# Altium PCB StationSolPortative.PcbDoc
Units mil, origin at the board's own origin, x right, y up, seen from the top; angles counter-clockwise.
Board outline 7255 x 4700 mil, 4 copper layers (Top Layer, Ground Plane, Power Plane, Botton Layer), stack 62.362 mil thick; 77 components, 74 nets, 388 pads, 55 vias.
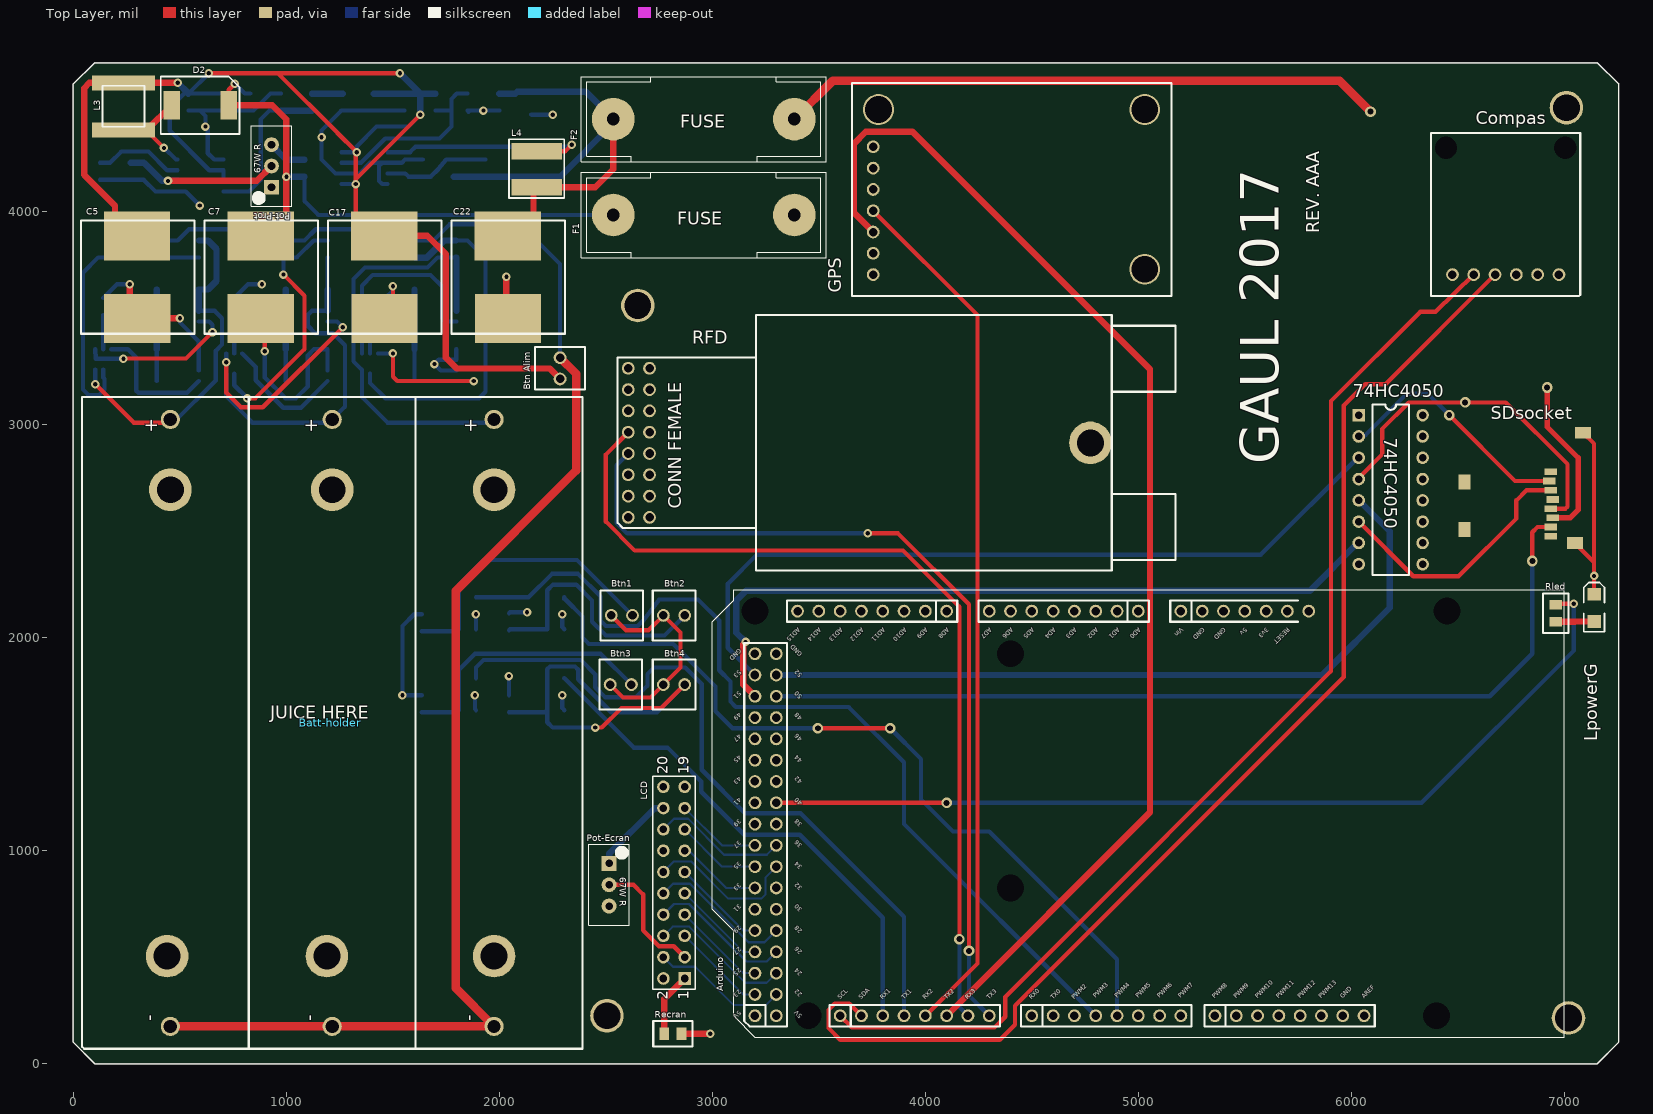
[diagram p0: Top Layer view]
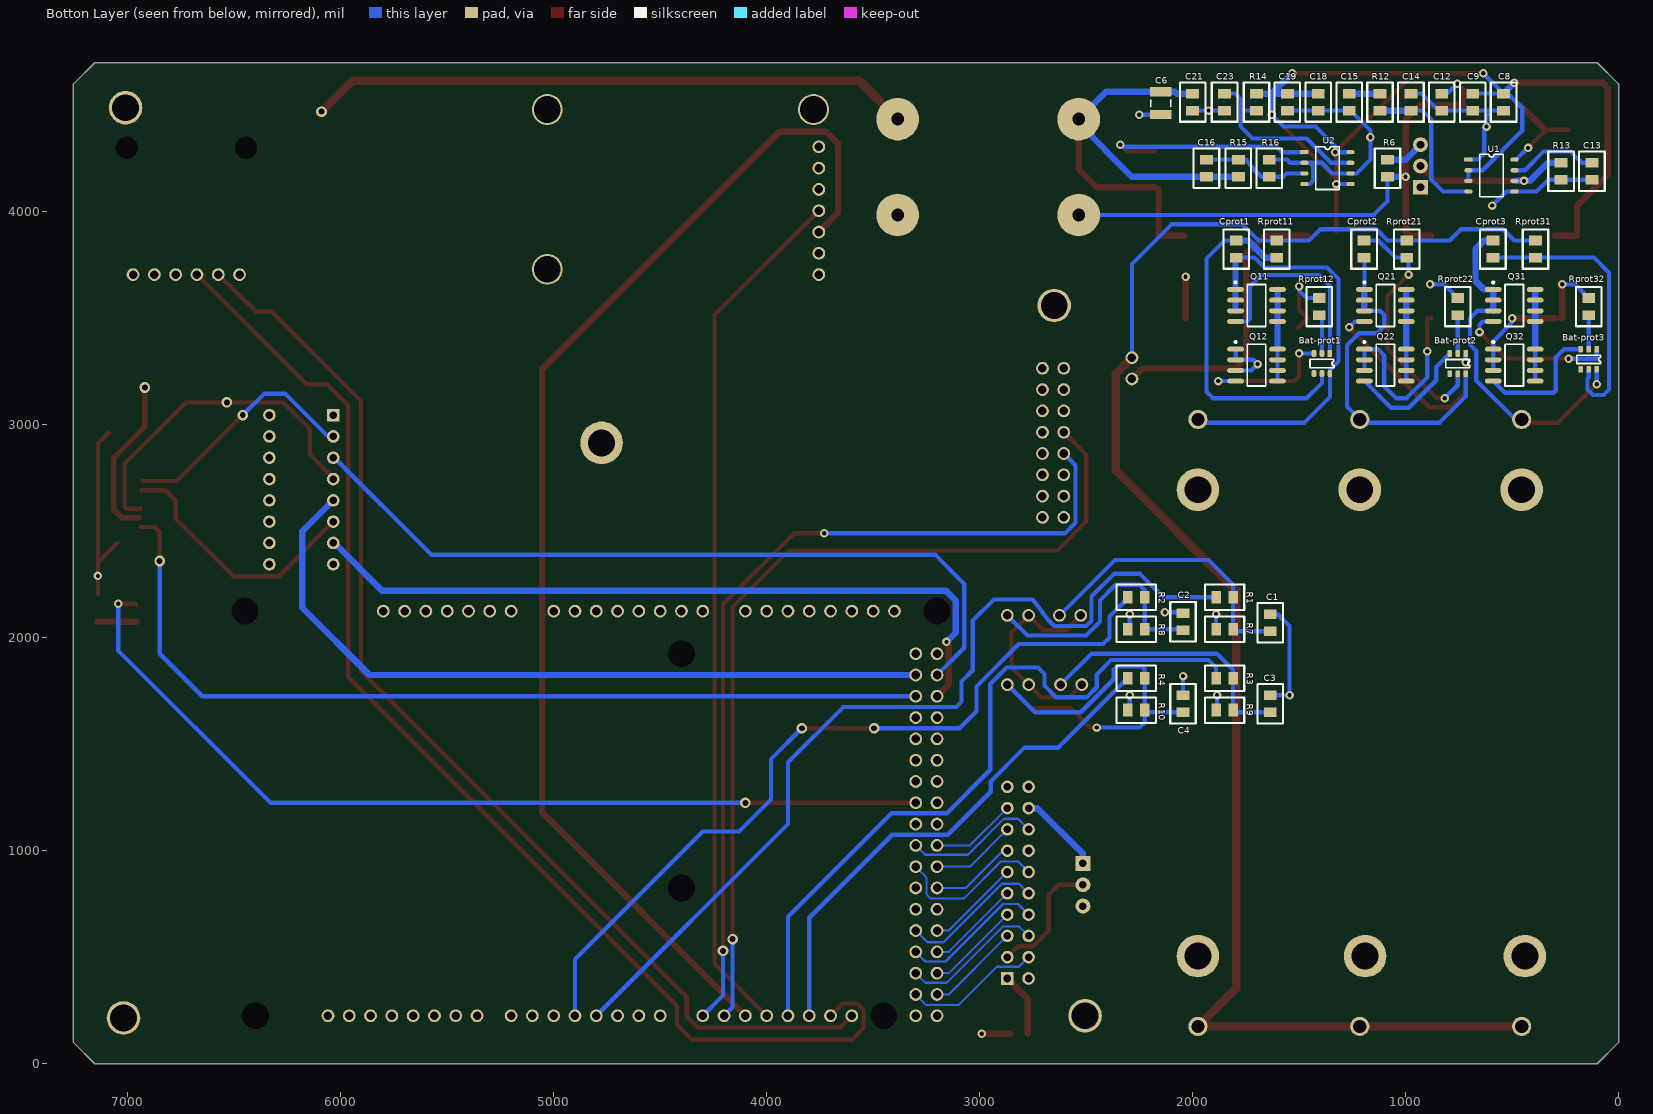
[diagram p1: Botton Layer view, seen from below]
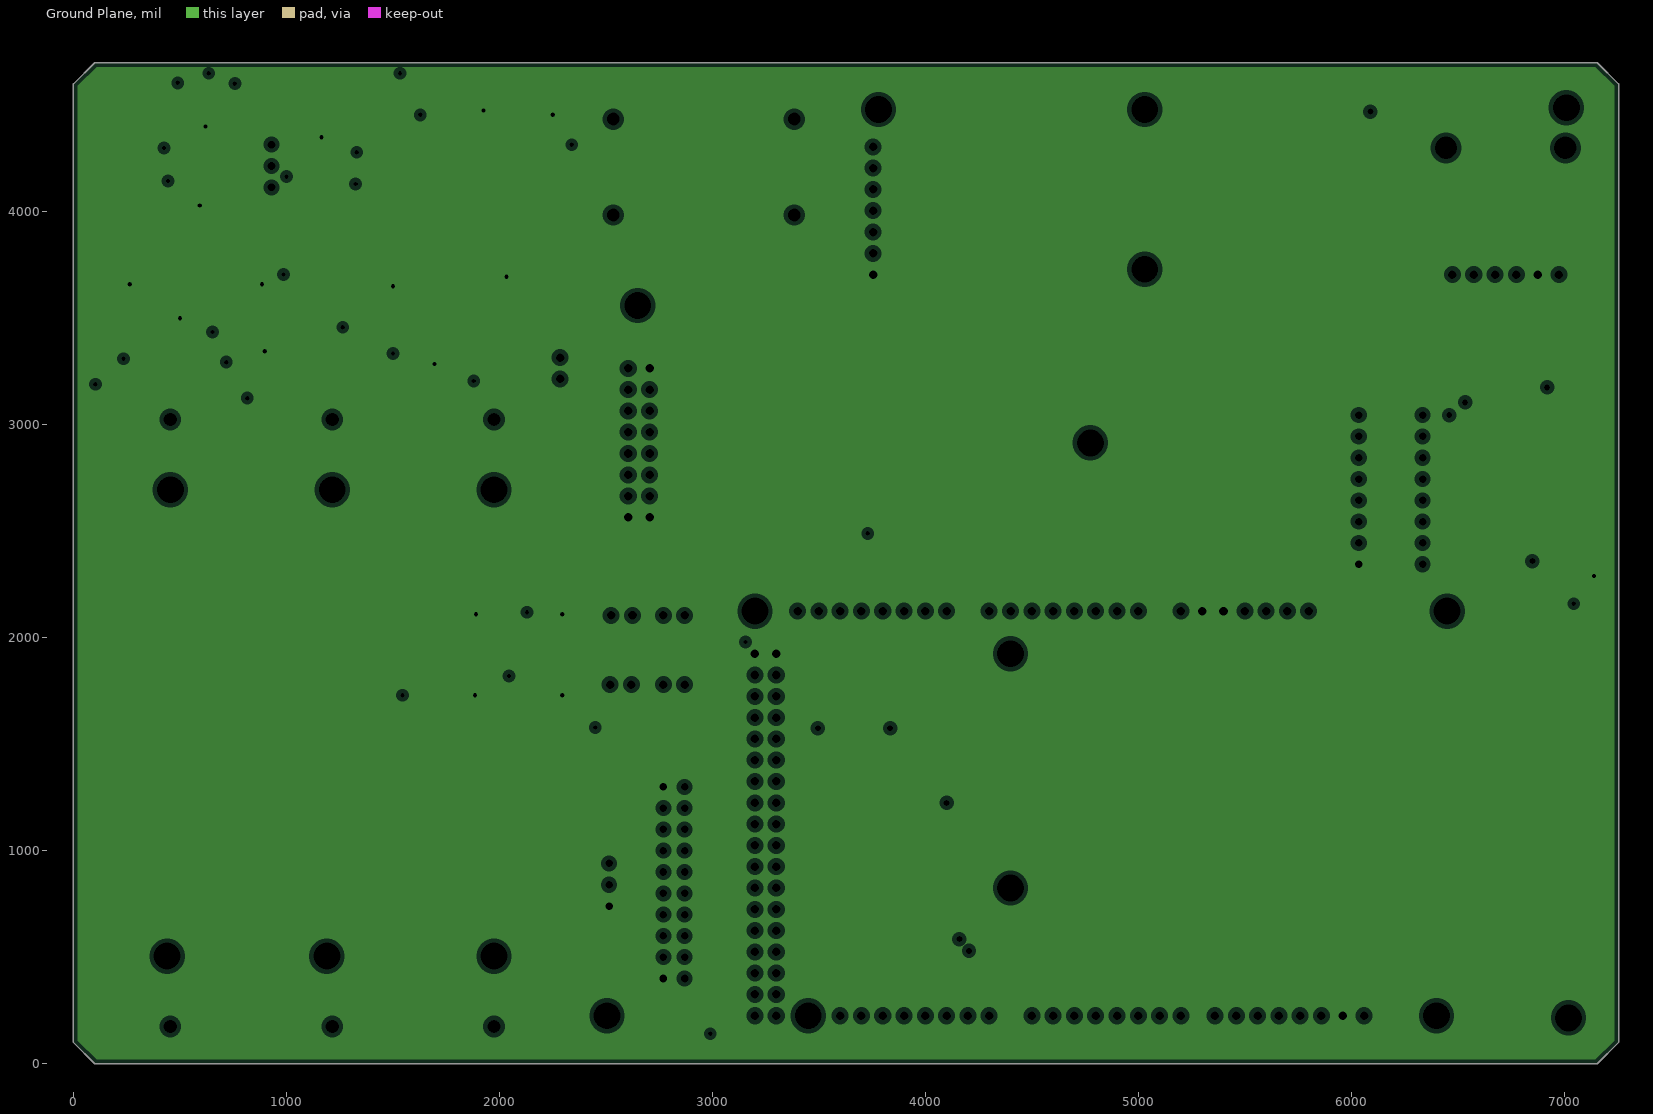
[diagram p2: Ground Plane, clearances drawn from the general rule]
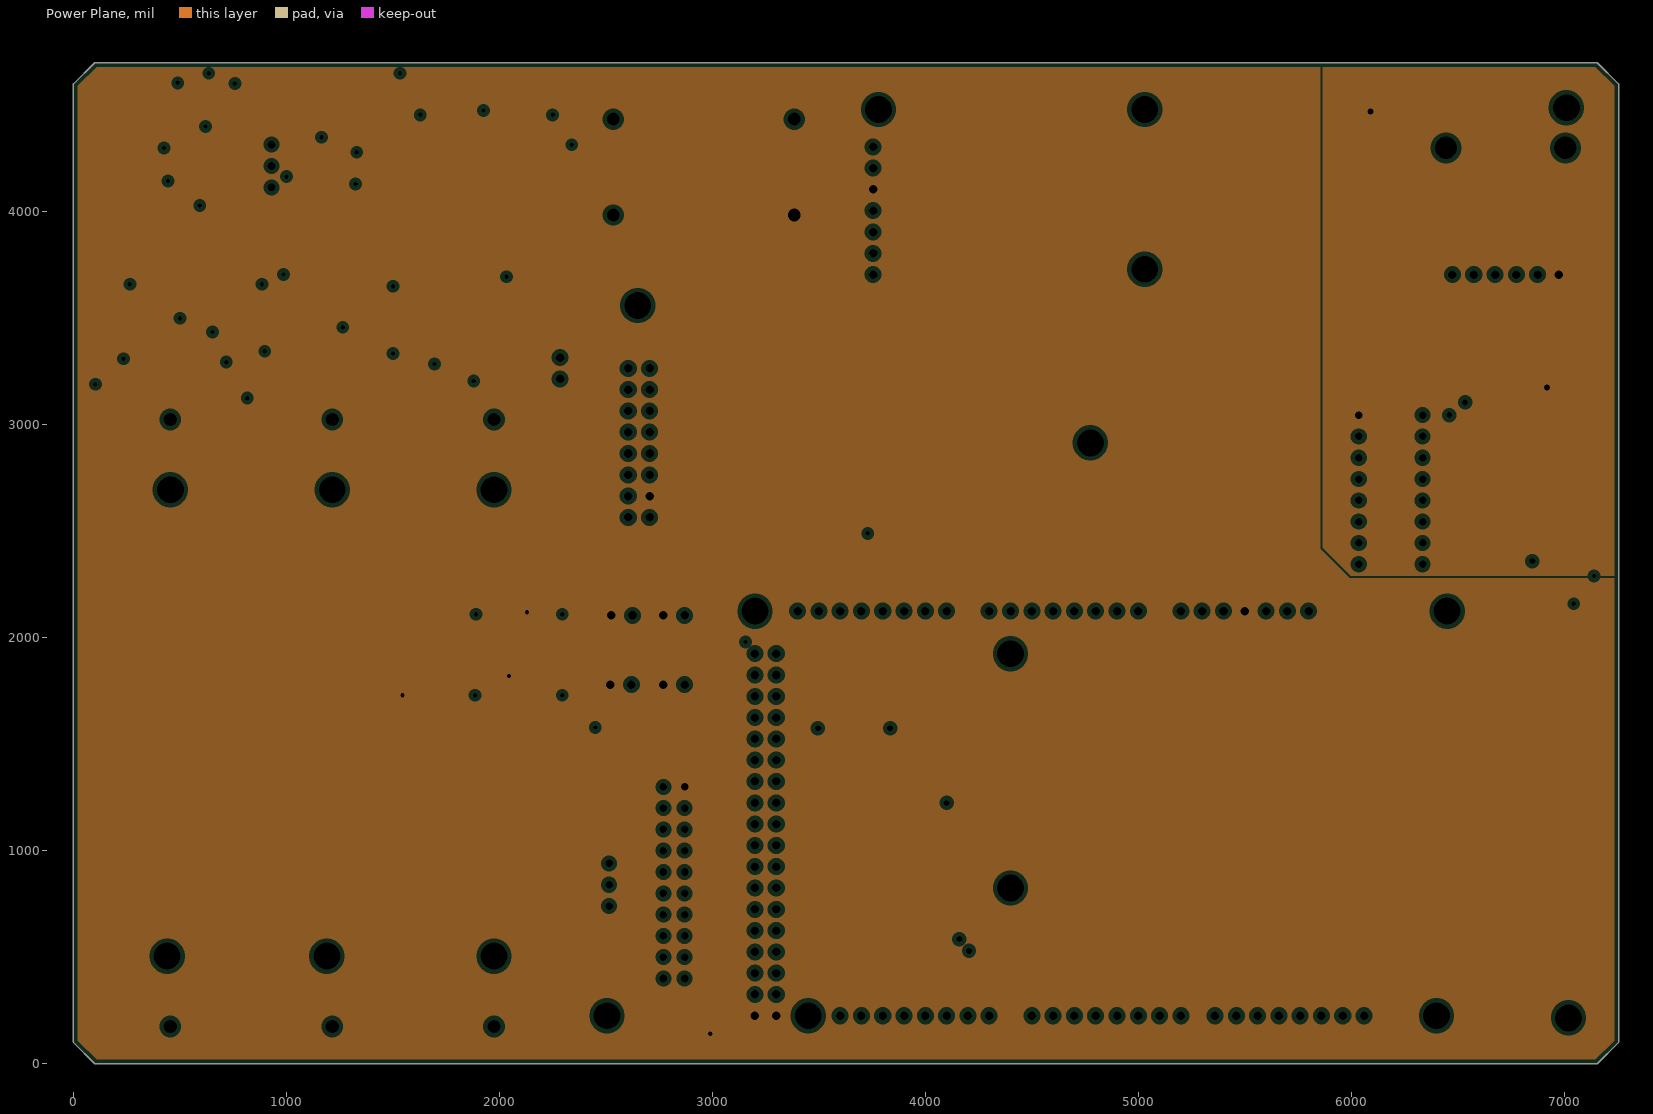
[diagram p3: Power Plane, clearances drawn from the general rule]
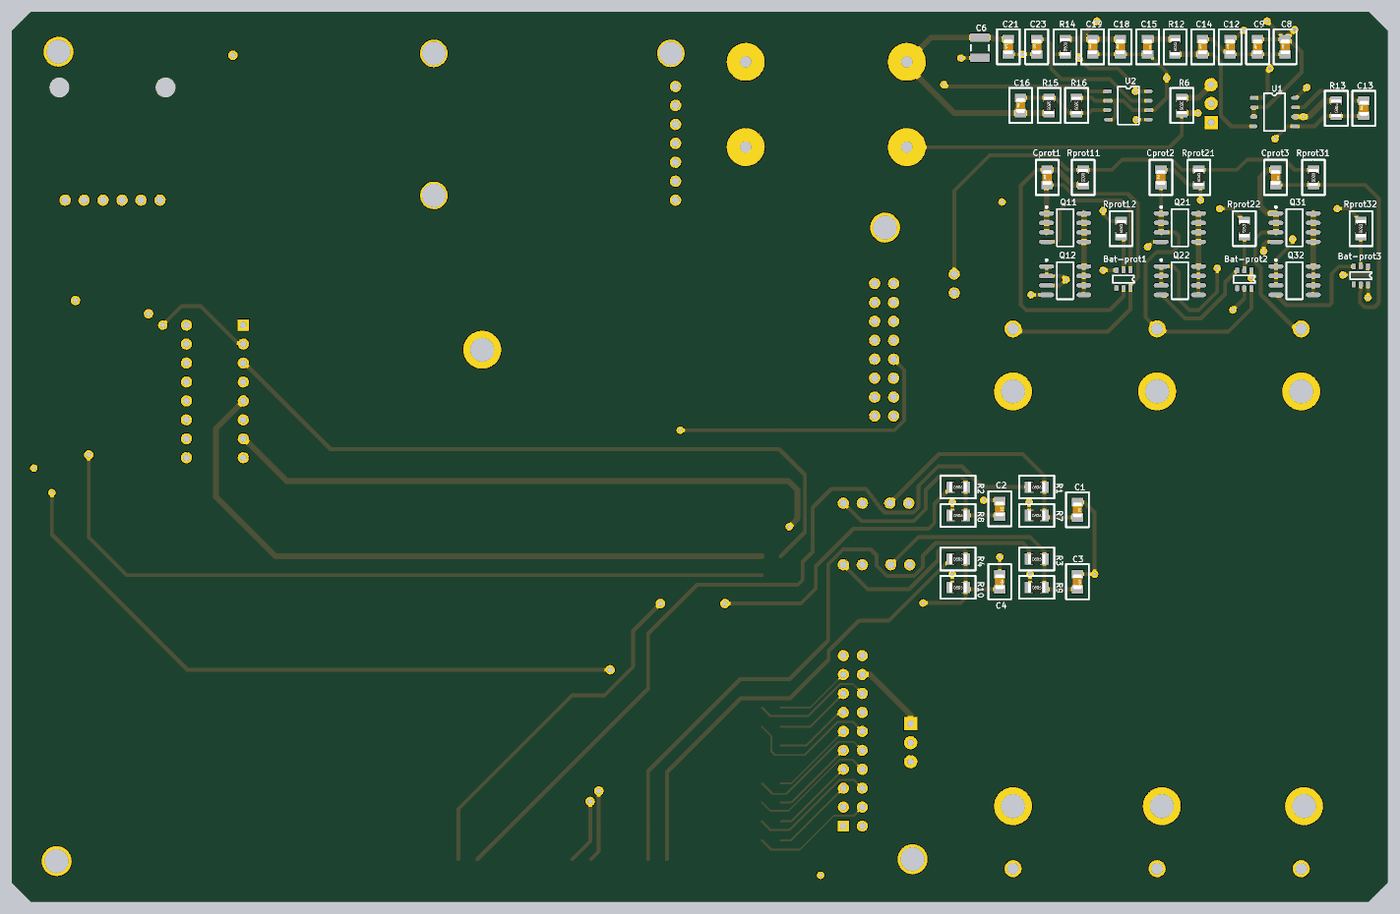
[diagram p4: 3D render of the assembled board from below, using the file's embedded part models]

## Layer stack, top to bottom
Top Solder: solder mask 0.3937, Solder Resist, Dk 3.5
Top Layer: signal copper 1.378
Dielectric 2: core 7.0866, FR-4, Dk 4.8
Ground Plane: plane copper 0.6693, net GND
Dielectric 1: prepreg 44.0945, Dk 4.2
Power Plane: plane copper 0.6693, net (Multiple Nets)
Dielectric 3: core 7.0866, FR-4, Dk 4.8
Botton Layer: signal copper 1.378
Bottom Solder: solder mask 0.3937, Solder Resist, Dk 3.5

## Board outline
0,100 0,4600 100,4700 7155,4700 7255,4600 7255,100 7155,0 100,0

## Design rules (kind name [scope] priority, off if disabled: settings)
Clearance [All] p1: gap=2 ignorepadtopadclearanceinfootprint=FALSE except(0: Arc-Hole Track-Hole SMDPad-Hole THPad-Hole Via-Hole Fill-Hole Poly-Hole Region-Hole Text-Hole; 8: Arc-Text Track-Text; 9: Arc-Arc Arc-Track Arc-SMDPad Arc-THPad Track-Track Track-SMDPad Track-THPad SMDPad-SMDPad SMDPad-THPad; 10: Arc-Via Track-Via SMDPad-Text THPad-Text Via-Text Fill-Text Poly-Text Region-Text Text-Text; 20: Arc-Fill Arc-Poly Arc-Region Track-Fill Track-Poly Track-Region THPad-THPad)
HoleSize [All] p1: absolutevalues=TRUE maxlimit=100 minlimit=5 maxpercent=80.000 minpercent=20.000
PlaneClearance [All] p1: clearance=20
PlaneConnect [All] p1: planeconnectstyle=Relief reliefexpansion=20 reliefentries=4 reliefconductorwidth=10 reliefairgap=10
PolygonConnect [All] p1: connectstyle=Relief reliefconductorwidth=10 reliefentries=4 polygonreliefangle="90 Angle" airgapwidth=10
RoutingVias [All] p1: holewidth=20 width=40 viastyle="Through Hole" minholewidth=20 minwidth=40 maxholewidth=20 maxwidth=40
SolderMaskExpansion [All] p1: expansion=5
Width [All] p1: maxlimit=40 minlimit=10 preferedwidth=10
27 further rules are at their usual default settings.

## Components (designator, comment, footprint, x,y, rotation, side; value= is the part's Value field where it differs from the comment)
74HC4050 "74HC4050" DIP16_74HC4050 6035,3045 r0 top
Arduino "ArduinoMega2560" ArduinoMega2560 9325,1875 r180 top
Bat-prot1 "AP9101C" SOT26 1355.3,3335 r270 bottom
Bat-prot2 "AP9101C" SOT26 717.9,3334.49 r270 bottom
Bat-prot3 "AP9101C" SOT26 102.9,3354.49 r270 bottom
Batt-holder "BH-BK-18650-PC6-ND" BH-BK-18650-PC6-ND 40,3130 r270 top
Btn1 "MAT100_2PINS" MTA100_2PINS 2675,1987.5 r90 top
Btn2 "MAT100_2PINS" MTA100_2PINS 2920,1987.5 r90 top
Btn3 "MAT100_2PINS" MTA100_2PINS 2670,1662.5 r90 top
Btn4 "MAT100_2PINS" MTA100_2PINS 2920,1662.5 r90 top
"Btn Alim" "MAT100_2PINS" MTA100_2PINS 2402.5,3365 r180 top
C1 "10 nF" "CAP 0805 - N" 1635,2070 r270 bottom
C2 "10 nF" "CAP 0805 - N" 2045,2075 r270 bottom
C3 "10 nF" "CAP 0805 - N" 1635,1690 r270 bottom
C4 "10 nF" "CAP 0805 - N" 2045,1690 r270 bottom
C5 "470 uF" "Gros condensateur" 135,3815 r270 top
C6 "Cap Semi" C1210 2150,4510 r90 bottom value=47uF
C7 "470 uF" "Gros condensateur" 715,3815 r270 top
C8 "10uf" "CAP 0805 - N" 540,4515 r90 bottom value="5 pF"
C9 "1uf" "CAP 0805 - N" 685,4515 r90 bottom value="5 pF"
C12 "10uf" "CAP 0805 - N" 830,4515 r90 bottom value="5 pF"
C13 "10uF" "CAP 0805 - N" 125,4190 r90 bottom value="5 pF"
C14 "Cap Pol1" "CAP 0805 - N" 975,4515 r90 bottom value=47pF
C15 "Cap Pol1" "CAP 0805 - N" 1265,4515 r270 bottom value=2.2nF
C16 "Cap Pol1" "CAP 0805 - N" 1935,4205 r90 bottom value=100pF
C17 "470 uF" "Gros condensateur" 1295,3815 r270 top
C18 "10uf" "CAP 0805 - N" 1410,4515 r90 bottom value="5 pF"
C19 "10uf" "CAP 0805 - N" 1555,4515 r90 bottom value="5 pF"
C21 "10uf" "CAP 0805 - N" 2000,4515 r90 bottom value="5 pF"
C22 "470 uF" "Gros condensateur" 1875,3815 r270 top
C23 "1uf" "CAP 0805 - N" 1850,4515 r90 bottom value="5 pF"
Compas "HMC5883L" HMC5883L 6475,3705 r0 top
Cprot1 "100 nF" "CAP 0805 - N" 1795,3825 r90 bottom value="5 pF"
Cprot2 "100 nF" "CAP 0805 - N" 1195,3825 r90 bottom value="5 pF"
Cprot3 "100 nF" "CAP 0805 - N" 590,3825 r270 bottom value="5 pF"
D2 "Diode SS34" Diode 595,4500 r0 top
F1 "Fuse" "Fuse Holder 3mm" 2960,3985 r180 top
F2 "Fuse" "Fuse Holder 3mm" 2960,4435 r180 top
GPS "GPS" "PAM-7Q GPS" 3655,4605 r270 top (schematic designator gps)
L3 "Inductor NR8040T6R8N" "Inductance 6.8uH" 235,4495 r270 top value=6.8uH
L4 "Inductor SRN6045-3R3Y" Inductance 2175,4200 r270 top value=3.3uH
LCD "Header 20" HDR2X10 2870,400 r90 top
LpowerG "LED 1206" "LED - 1206" 7140,2140 r90 top
Pot-Ecran "Res Pot" "Trim 67WR" 2515,840 r90 top value=1K
Pot-Prot "Res Pot" "Trim 67WR" 930,4215 r270 top value=10K
Q11 "SI4410DY" SO-8_N 1700,3560 r180 bottom
Q12 "SI4410DY" SO-8_N 1700,3280 r180 bottom
Q21 "SI4410DY" SO-8_N 1095,3560 r180 bottom
Q22 "SI4410DY" SO-8_N 1095,3280 r180 bottom
Q31 "SI4410DY" SO-8_N 490,3560 r180 bottom
Q32 "SI4410DY" SO-8_N 490,3280 r180 bottom
R1 "Res smd" "Res 0805 - N" 1850,2190 r180 bottom value=470
R2 "Res smd" "Res 0805 - N" 2265,2190 r180 bottom value=470
R3 "Res smd" "Res 0805 - N" 1850,1810 r180 bottom value=470
R4 "Res smd" "Res 0805 - N" 2265,1810 r180 bottom value=470
R6 "Res1" "Res 0805 - N" 1085,4205 r270 bottom value=20K
R7 "Res smd" "Res 0805 - N" 1850,2040 r180 bottom value=4.7k
R8 "Res smd" "Res 0805 - N" 2265,2040 r180 bottom value=4.7k
R9 "Res smd" "Res 0805 - N" 1850,1660 r180 bottom value=4.7k
R10 "Res smd" "Res 0805 - N" 2265,1660 r180 bottom value=4.7k
R12 "Res1" "Res 0805 - N" 1120,4515 r270 bottom value=51K
R13 "Res1" "Res 0805 - N" 270,4190 r90 bottom value=10K
R14 "Res1" "Res 0805 - N" 1700,4515 r90 bottom value=1K
R15 "Res1" "Res 0805 - N" 1785,4205 r270 bottom value=680K
R16 "Res1" "Res 0805 - N" 1640,4205 r270 bottom value=150K
Recran "Res smd" "Res 0805 - N" 2815,140 r180 top value=1K
RFD "Component_1" RFD900 4770,2920 r180 top
Rled "Res smd" "Res 0805 - N" 6960,2115 r270 top value=300
Rprot11 "Res smd" "Res 0805 - N" 1605,3825 r270 bottom value=330
Rprot12 "Res smd" "Res 0805 - N" 1405,3555 r270 bottom value=2.7k
Rprot21 "Res smd" "Res 0805 - N" 995,3825 r270 bottom value=330
Rprot22 "Res smd" "Res 0805 - N" 755,3555 r270 bottom value=2.7k
Rprot31 "Res smd" "Res 0805 - N" 390,3825 r270 bottom value=330
Rprot32 "Res smd" "Res 0805 - N" 140,3555 r270 bottom value=2.7k
SDsocket "Carte micro SD" "Carte SD" 6720,2625 r270 top
U1 "PAM2421" SOP8 705,4245 r180 bottom
U2 "PAM2320" SOP8 1475,4280 r180 bottom

## Footprints (in the part's own frame and the unit in brackets; to place one, negate y for a bottom-side part, rotate by r counter-clockwise, add the part's x,y. Pads: shape width x height; smd on the part's side, far side on the other; paste and mask are expansions set on the pad)
ArduinoMega2560 [mil]
  round 60 hole 40: 0(4825,1650) 1(4725,1650) 2(4625,1650) 3(4525,1650) 3.3V(3725,-250) 4(4425,1650) 5(4325,1650) 5V(3825,-250) 5V(6025,1650) 5V(6125,1650) 6(4225,1650) 7(4125,1650) 8(3965,1650) 9(3865,1650) 10(3765,1650) 11(3665,1650) 12(3565,1650) 13(3465,1650) 14(5025,1650) 15(5125,1650) 16(5225,1650) 17(5325,1650) 18(5425,1650) 19(5525,1650) 20(5625,1650) 21(5725,1650) 22(6025,1550) 23(6125,1550) 24(6025,1450) 25(6125,1450) 26(6025,1350) 27(6125,1350) 28(6025,1250) 29(6125,1250) 30(6025,1150) 31(6125,1150) 32(6025,1050) 33(6125,1050) 34(6025,950) 35(6125,950) 36(6025,850) 37(6125,850) 38(6025,750) 39(6125,750) 40(6025,650) 41(6125,650) 42(6025,550) 43(6125,550) 44(6025,450) 45(6125,450) 46(6025,350) 47(6125,350) 48(6025,250) 49(6125,250) 50(6025,150) 51(6125,150) 52(6025,50) 53(6125,50) A0(4325,-250) A1(4425,-250) A2(4525,-250) A3(4625,-250) A4(4725,-250) A5(4825,-250) A6(4925,-250) A7(5025,-250) A8(5225,-250) A9(5325,-250) A10(5425,-250) A11(5525,-250) A12(5625,-250) A13(5725,-250) A14(5825,-250) A15(5925,-250) AREF(3265,1650) GND(3365,1650) GND(3925,-250) GND(4025,-250) GND(6025,-50) GND(6125,-50) IOREF(3525,-250) RST(3625,-250) VIN(4125,-250)
  round 62.99 hole 125.98: 99(2875,-250) 99(2925,1650) 99(4925,-50) 99(4925,1050) 99(5875,1650) 99(6125,-250)
  silkscreen extent 2325,-350 6325,1750
BH-BK-18650-PC6-ND [mil] "Battery holder 3 cell 18650 lithium"
  round 200 hole 126: 0(435,1935) 0(435,1175) 0(435,415) 0(2625,1935) 0(2625,400) 0(2625,1150)
  round 90 hole 62: 1(105,415) 2(105,1175) 3(105,1935) 4(2955,415) 5(2955,1175) 6(2955,1935)
  silkscreen extent 0,0 3060,2350
C1210 [mm] "Chip Capacitor, Body 3.2x2.5mm, IPC High Density"
  rect 1.1x2.6 smd: 1(-1.35,0) 2(1.35,0)
  silkscreen extent -0.4,-1.2 0.4,1.2, body extent -1.7,-1.35 1.7,1.35, height 1.3
"CAP 0805 - N" [mil]
  rect 45x60 smd: 1(-40,0) 2(40,0)
  silkscreen extent -93,-60 93,60, body extent -39,-25 39,25, height 31
"Carte SD" [mm]
  rect 0.8x1.5 smd: 1(-3.919,5.52) 2(-2.819,5.32) 3(-1.719,5.52) 4(-0.619,5.72) 5(0.481,5.52) 6(1.581,5.72) 7(2.681,5.52) 8(3.781,5.52)
  rect 1.8x1.4 smd: 9(2.981,-4.78) 10(-2.719,-4.78)
  rect 1.4x1.9 smd: 11(-8.569,9.37) 12(4.581,8.37)
  body extent -9,-5.59 5.1,9.61, height 1.87
Diode [mm]
  rect 1.96x3.39 smd: 1(3.405,0) 3(-3.405,0)
  silkscreen extent -4.7,-3.43 4.7,3.43, body extent -4.06,-3.12 4.06,3.17, height 2.64
DIP16_74HC4050 [mm]
  rect 1.5x1.5 hole 0.9: 1(0,0)
  round 1.5 hole 0.9: 2(0,-2.54) 3(0,-5.08) 4(0,-7.62) 5(0,-10.16) 6(0,-12.7) 7(0,-15.24) 8(0,-17.78) 9(7.62,-17.78) 10(7.62,-15.24) 11(7.62,-12.7) 12(7.62,-10.16) 13(7.62,-7.62) 14(7.62,-5.08) 15(7.62,-2.54) 16(7.62,0)
  silkscreen extent 1.64,-19.05 5.98,1.27
"Fuse Holder 3mm" [mil] "Fuse Holder 3mm"
  round 200 hole 60: 1(-425,0) 2(425,0)
  silkscreen extent -575,-200 575,200, body extent -575,-200 575,200, height 400
"Gros condensateur" [mil]
  rect 230x311 smd: minus(315,165) plus(-72,164)
  silkscreen extent -145,-100 389,433
HDR2X10 [mm] "Connector; Header; 10x2 Position"
  rect 1.5x1.5 hole 0.9: 1(0,0)
  round 1.5 hole 0.9: 2(0,2.54) 3(2.54,0) 4(2.54,2.54) 5(5.08,0) 6(5.08,2.54) 7(7.62,0) 8(7.62,2.54) 9(10.16,0) 10(10.16,2.54) 11(12.7,0) 12(12.7,2.54) 13(15.24,0) 14(15.24,2.54) 15(17.78,0) 16(17.78,2.54) 17(20.32,0) 18(20.32,2.54) 19(22.86,0) 20(22.86,2.54)
  silkscreen extent -1.27,-1.27 24.13,3.81
HMC5883L [mil] "Compass"
  round 60 hole 40: 0(0,0) 1(100,0) 2(200,0) 3(300,0) 4(400,0) 5(500,0)
  round 60 hole 105: 10(-30,595) 11(530,595)
  silkscreen extent -100,-100 600,665
Inductance [mm]
  rect 2x6 smd: 1(-2.15,0) 2(2.15,0)
  silkscreen extent -3.56,-3.3 3.43,3.3, body extent -3.02,-3.13 3.28,2.87, height 4.5
"Inductance 6.8uH" [mm]
  rect 1.8x7.5 smd: 1(-2.8,0) 2(2.8,0)
  silkscreen extent -2.45,-2.5 2.45,2.5
"LED - 1206" [mm]
  rect 1.5x1.6 smd: 1(-1.625,0) 2(1.625,0)
  silkscreen extent -2.82,-1.25 3.03,1.25, body extent -1.61,-0.8 1.61,0.8, height 1.1
MTA100_2PINS [mil]
  round 60 hole 40: 1(117.5,150) 2(117.5,50)
  silkscreen extent 0,0 235,200
"PAM-7Q GPS" [mil]
  round 60 hole 40: 0(900,100) 1(800,100) 2(700,100) 3(600,100) 4(500,100) 5(400,100) 6(300,100)
  round 145 hole 125: 7(125,1375) 7(125,125) 7(875,1375)
  silkscreen extent 0,0 1000,1500
"Res 0805 - N" [mil]
  rect 45x60 smd: 1(-40,0) 2(40,0)
  silkscreen extent -93,-60 93,60, body extent -45,-27 45,27, height 30
RFD900 [mil]
  round 200 hole 125.98: 0(-5,5)
  round 60 hole 40: 1(2165,355) 2(2065,355) 3(2165,255) 4(2065,255) 5(2165,155) 6(2065,155) 7(2165,55) 8(2065,55) 9(2165,-45) 10(2065,-45) 11(2165,-145) 12(2065,-145) 13(2165,-245) 14(2065,-245) 15(2165,-345) 16(2065,-345)
  silkscreen extent -405,-595 2215,605
SO-8_N [mm] "SOIC, 8-Leads, Body 4.9x3.9mm, Pitch 1.27mm, IPC Medium Density"
  oval 2x0.6 smd: 1(-2.5,1.905) 2(-2.5,0.635) 3(-2.5,-0.635) 4(-2.5,-1.905) 5(2.5,-1.905) 6(2.5,-0.635) 7(2.5,0.635) 8(2.5,1.905)
  silkscreen extent -2.63,-2.5 1.1,2.88, body extent -2,-2.5 2,2.5, height 1.75
SOP8 [mm]
  rect 1x0.5 smd: 1(0,0)
  oval 1x0.5 smd: 2(0,-1.27) 3(0,-2.54) 4(0,-3.81) 5(5.5,-3.81) 6(5.5,-2.54) 7(5.5,-1.27) 8(5.5,0)
  silkscreen extent 1.33,-4.45 4.16,0.63
SOT26 [mm]
  rect 0.8x0.55 smd: 1(0,0)
  rrect50% 0.8x0.55 smd: 2(0,-0.95) 3(0,-1.9) 4(2.4,-1.9) 5(2.4,-0.95) 6(2.4,0)
  silkscreen extent 0.71,-2.38 1.7,0.48
"Trim 67WR" [mil] "Trim 10T Vertical"
  rect 70x70 hole 35.4: 1(100,0)
  round 70 hole 35.4: 2(0,0) 3(-100,0)
  silkscreen extent -190,-95 190,95, body extent -190,-95 190,95, height 478

## Part data
C1 C2 C3 C4 C8 C9 C12 C13 C18 C19 C21 C23 Cprot1 Cprot2 Cprot3: library part "Condensateur smd"
C5 C7 C17 C22: library part "Gros condensateur"
C6: "Capacitor (Semiconductor SIM Model)", LatestRevisionDate=29-May-2009, LatestRevisionNote="IPC-7351 Footprint Added.", PackageDescription="Chip Capacitor", PackageReference=C1206, Published=8-Jun-2000, Publisher="Altium Limited"
C14 C15 C16: "Polarized Capacitor (Radial)", LatestRevisionDate=17-Jul-2002, LatestRevisionNote="Re-released for DXP Platform.", PackageDescription="Polarized Capacitor (Radial); 2 Leads", PackageReference=RB7.6-15, Published=8-Jun-2000, Publisher="Altium Limited"
Compas: "Compass"
D2: library part "Diode 10TQ035", "Schottky Rectifier", ComponentLink1Description="Manufacturer Link", ComponentLink1URL=http://www.irf.com/, ComponentLink2Description=Datasheet, ComponentLink2URL=http://www.irf.com/product-info/datasheets/data/10tq.pdf, DatasheetVersion=PD-2.057B, LatestRevisionDate=17-Jul-2002, LatestRevisionNote="Re-released for DXP Platform.", Note="Terminal 2 is the TAB and is electrically connected to the cathode", PackageDescription="TO, Thru-Hole, Vertical, Heatsink Mounted; 3 In-Line Leads (1 Absent); Pitch 2.54 mm", PackageReference=TO-220AC, PackageVersion=Feb-1998, Published=8-Jun-2000, Publisher="Altium Limited"
GPS: library part "Pam-Q7 GPS"
L3 L4: library part Inductor, "Inductor", Code_IEC=1005, Code_JEITA=0402, LatestRevisionDate=29-May-2009, LatestRevisionNote="IPC-7351 Footprint Added.", PackageDescription="Chip Inductor", PackageReference=0402-A, Published=8-Jun-2000, Publisher="Altium Limited"
LCD: "Header, 20-Pin", LatestRevisionDate=17-Jul-2002, LatestRevisionNote="Re-released for DXP Platform.", Publisher="Altium Limited"
LpowerG: library part LED, Color=Green
Pot-Ecran Pot-Prot: "Resistor Trimmer"
Q11 Q12 Q21 Q22 Q31 Q32: "N-Channel 30V (D-S)  MOSFET", ComponentLink1Description="Manufacturer Link", ComponentLink1URL=http://www.vishay.com/, ComponentLink2Description=Datasheet, ComponentLink2URL=http://www.vishay.com/docs/71726/71726.pdf, DatasheetVersion=23-Nov-1998, LatestRevisionDate=13-Apr-2006, LatestRevisionNote="IPC-7351 Footprint Added.", PackageDescription="8-Pin Small Outline Integrated Circuit 1.27 mm Pitch", PackageReference=SO-8, PackageVersion=Aug-1998, Published=8-Jun-2000, Publisher="Altium Limited"
R6 R12 R13 R14 R15 R16: "Resistor", LatestRevisionDate=17-Jul-2002, LatestRevisionNote="Re-released for DXP Platform.", PackageDescription="Axial Device, Thru-Hole; 2 Leads; 0.3 in Pin Spacing", PackageReference=AXIAL-0.3, Published=8-Jun-2000, Publisher="Altium Limited"
SDsocket: library part "Carte SD"
U1: "3A PWM STEP-UP DC-DC CONVERTER", =PAM2421
U2: "3A LOW NOISE STEP-DOWN DC-DC CONVERTER", NAME=PAM2303
Bat-prot1 Bat-prot2 Bat-prot3: NAME=AP9101C

## Free pads (board coordinates)
  round 157.48 hole 125.98: MTN(2505,225) MTN(2650,3560) MTN(7010,4488.58) MTN(7020,215)

## Via types
v1: diameter 40, hole 20, Top Layer to Botton Layer, 45 vias
v2: diameter 50, hole 28, Top Layer to Botton Layer, 10 vias

## Nets (pads, with @x,y where several pads share a name; then routed paths per layer and width w, separated by ;. In a path a pad name is that pad's centre, name@x,y a point inside that pad or via, vN(x,y) a via of type N, cw(c..) or ccw(c..) an arc to the next point about the centre after c; other vN are vias at no path point)
5V: Arduino.5V Btn1.1 Btn2.1 Btn3.1 Btn4.1 C1.1 C2.1 C3.1 C4.1 F1.1 GPS.4 LCD.19 Recran.1 RFD.4 | length 1829
  Top Layer w20: Btn3.1 2580.22,1719.78 2709.78,1719.78 Btn4.1 2850,1860 2850,2025 Btn2.1 2700,2035 2595,2035 Btn1.1
  Top Layer w30: Recran.1 v1(2990,140)
  Botton Layer w20: C3.1 v1(1545,1730) 1545,2055 1600,2110 C1.1 ; C4.1 v1@2045,1815 ; C2.1 2050,2120 v1(2130,2120)
  other v1: 2045,1820
+3.3V: 74HC4050.1 Compas.5 F2.1 SDsocket.6 | length 3609.9
  Top Layer w25: v2(6920,3175) 6920,2990 7065,2845 7065,2600 7027.76,2562.76 SDsocket.6
  Top Layer w40: F2.1 3565,4615 5945,4615 v2(6090,4470)
B1: Arduino.3 R1.1 | length 4356.3
  Botton Layer w20: R1.1 2136.7,2190 2246.7,2300 2369.5,2300 2475,2194.5 2475,2080 2500,2055 2650,2055 2675,2080 2750,2180 2933,2180 3032,2081 3032,1847 3085,1794 3085,1700 3110,1675 3640,1675 3900,1415 3900,1125 Arduino.3
B2: Arduino.4 R2.1 | length 3806.3
  Top Layer w20: v2(3495,1575) v2(3835,1575)
  Botton Layer w20: R2.1 2305,2182 2309.29,2180.71 2390,2100 2390,2000 2420,1970 2816,1970 3015,1771 3015,1655 3095,1575 v2(3495,1575) ; v2(3835,1575) 3980,1430 3980,1240 4130,1090 4300,1090 4900,490 Arduino.4
B3: Arduino.18 R3.1 | length 3457.1
  Botton Layer w20: R3.1 1890,1860 1925,1895 2382.43,1895 2450,1827.43 2450,1767.5 2497.5,1720 2640,1720 2695,1775 2695,1829 2726,1860 2872.5,1860 2950,1782.5 2950,1380 3154,1176 3414,1176 3900,690 Arduino.18
B4: Arduino.19 R4.1 | length 2449.1
  Botton Layer w20: R4.1 2631,1484 2789,1484 2948,1325 2948,1277 3150,1075 3410,1075 3800,685 Arduino.19
CS1: Arduino.34 LCD.12 | length 732.2
  Botton Layer w10: LCD.12 2820,950 2900,950 3075,775 3230,775 3250,795 3250,875 Arduino.34
CS2: Arduino.33 LCD.13 | length 402.5
  Botton Layer w10: LCD.13 2890,1000 3065,825 Arduino.33
D0: Arduino.22 LCD.4 | length 643.9
  Botton Layer w10: LCD.4 2815,455 2920,455 3100,275 3250,275 Arduino.22
D1: Arduino.23 LCD.5 | length 443.9
  Botton Layer w10: LCD.5 3145,325 Arduino.23
D2: Arduino.24 LCD.6 | length 675.8
  Botton Layer w10: LCD.6 2813.53,643.53 2891.47,643.53 3155,380 3255,380 Arduino.24
D3: Arduino.25 LCD.7 | length 443.9
  Botton Layer w10: LCD.7 3145,425 Arduino.25
D4: Arduino.26 LCD.8 | length 681.2
  Botton Layer w10: LCD.8 2820,750 2890,750 3160,480 3255,480 Arduino.26
D5: Arduino.27 LCD.9 | length 443.9
  Botton Layer w10: LCD.9 3145,525 Arduino.27
D6: Arduino.28 LCD.10 | length 685.3
  Botton Layer w10: LCD.10 2815,845 2895,845 3170,570 3245,570 Arduino.28
D7: Arduino.29 LCD.11 | length 443.9
  Botton Layer w10: LCD.11 3145,625 Arduino.29
E: Arduino.37 LCD.17 | length 402.5
  Botton Layer w10: LCD.17 3045,1025 Arduino.37
GND: 74HC4050.8 Arduino.GND C5.minus C6.1 C7.minus C8.1 C9.1 C12.1 C13.1 C14.2 C15.2 C17.minus C18.1 C19.1 C21.1 C22.minus C23.1 Compas.4 GPS.0 LCD.2 LCD.20 LpowerG.2 Pot-Ecran.3 Q12.1 Q12.2 Q12.3 Q22.1 Q22.2 Q22.3 Q32.1 Q32.2 Q32.3 R7.1 R8.1 R9.1 R10.1 R13.1 R16.1 RFD.1 RFD.2 RFD.16 Rprot12.1 Rprot22.1 Rprot32.1 SDsocket.11 SDsocket.12 U1.1 U1.5 U2.2 U2.4 U2.6 | length 6817.1
  Top Layer w20: C5.minus@265,3500 C5.minus ; C7.minus 898,3500 v1(898,3345) ; v1(1500,3650) 1500,3540 C17.minus C17.minus@1505,3455 ; C22.minus@2033,3500 C22.minus ; SDsocket.12 7140,2354.17 ; SDsocket.11 7140,2911.26 7140,2354.17 ; LpowerG.2 v1(7140,2290) 7140,2354.17
  Top Layer w30: C5.minus@265,3500 v1(265,3660) ; C5.minus v1(500,3500) ; C22.minus@2033,3500 v1(2033,3695)
  Botton Layer w20: C13.1 R13.1 330,4150 385,4095 U1.5 527,4095 v1(593,4029) ; Rprot32.1 205,3660 v1(265,3660) ; v1(500,3500) 500,3480 588.43,3391.57 Q32.1 ; C8.1 595,4475 ; Q32.3 588,3255 Q32.2@588,3305 ; U1.1 661,4245 631,4275 631,4400 v1(620,4400) 620,4450 595,4475 ; Rprot22.1 820,3660 v1(885,3660) ; v1(898,3345) 898,3222 995,3125 1045,3125 1100,3180 1100,3325 1130,3355 Q22.1@1193,3355 ; C14.2 925,4555 845,4475 C12.1 C9.1 595,4475 ; Q22.3 1193,3255 1193,3280 1193.43,3280.43 Q22.2 1193,3305 Q22.1@1193,3355 ; Q22.1 Q22.1@1193,3355 ; Rprot12.1 1464,3595 1500,3631 v1(1500,3650) ; U2.4 1450,4130 1435,4145 1435,4215 1450,4230 ; C19.1 C18.1 C15.2 1258,4475 1165,4382 v1(1165,4350) 1165,4245 1230,4180 U2.6 1343,4180 1393,4230 1450,4230 ; R16.1 1557,4245 1542,4230 U2.2 1450,4230 ; Q12.3 1725,3255 v1(1695,3285) 1715,3305 Q12.2@1798,3305 ; C23.1 1855,4470 1860,4475 v1(1925,4475) C21.1 ; v1(1885,1730) 1885,1665 R9.1 ; R7.1 v1(1890,2110) ; C6.1 2151.85,4455 v1(2250,4455) ; v1(2295,1730) 2295,1670 R10.1 ; v1(2295,2110) 2295,2050 R8.1 ; Q32.2@588,3305 588,3355 588.43,3354.57 Q32.2 Q32.2@588,3305 ; Q12.2@1798,3305 1798,3355 Q12.1 Q12.2 Q12.2@1798,3305
"Mega cs": 74HC4050.3 Arduino.53 | length 3691.3
  Botton Layer w20: Arduino.53 3072.01,1952.99 3072.01,2252.99 3209.01,2390 5575,2390 74HC4050.3@6035,2850
MISO: Arduino.50 SDsocket.7 | length 4300.3
  Top Layer w20: v2(6850,2360) 6850,2495 6874.45,2519.45 SDsocket.7
  Botton Layer w20: Arduino.50 6650,1725 6850,1925 v2(6850,2360)
MOSI: 74HC4050.7 Arduino.51 | length 3532.5
  Top Layer w30: v1(3156,1980) 3145,1969 3145,1780 Arduino.51
  Botton Layer w30: v1(3156,1980) 3112.01,2023.99 3112.01,2175 3158.01,2221 5806,2221 74HC4050.7@6035,2450
NetArduino_40: Arduino.40 Rled.1 | length 4348.2
  Top Layer w20: Arduino.40 v2(4100,1225) ; Rled.1 6965,2160 v1(7045,2160)
  Botton Layer w20: v2(4100,1225) 6330,1225 7045,1940 v1(7045,2160)
NetBat-prot1_CO: Bat-prot1.3 Q12.4 | length 649.7
  Top Layer w20: v1(1500,3335) 1500,3225.1 1520.1,3205 v1(1880,3205)
  Botton Layer w20: Bat-prot1.3 v1(1500,3335) ; Q12.4 v1(1880,3205)
NetBat-prot1_DO: Bat-prot1.1 Q11.4 | length 960.4
  Botton Layer w20: Bat-prot1.1 1355.3,3346 1355,3346.3 1355,3653 1405,3703 1677,3703 1730,3650 1730,3500 1745,3485 Q11.4
NetBat-prot1_VDD: Bat-prot1.5 Cprot1.2 Rprot11.2 | length 1651.8
  Botton Layer w20: Bat-prot1.5 1392.7,3196.3 1464,3125 1905,3125 1935,3155 1935,3780 1850,3865 Cprot1.2
  Botton Layer w30: Rprot11.2 1660,3785 1740,3865 Cprot1.2
NetBat-prot1_VM: Bat-prot1.2 Rprot12.2 | length 185.4
  Botton Layer w20: Bat-prot1.2@1392,3335 1392,3502 Rprot12.2
NetBat-prot1_VSS: Bat-prot1.6 Batt-holder.3 Cprot1.1 Q11.1 Q11.2 Q11.3 | length 2030.3
  Botton Layer w20: Cprot1.1 1710,3785 1663,3738 1369,3738 1315.3,3684.3 1315.3,3297.7 1355.3,3257.7 Bat-prot1.6 1355.3,3129.7 1475,3010 Batt-holder.3@1990,3010
  Botton Layer w30: Cprot1.1 1798.43,3785 Q11.1 Q11.2 Q11.3
NetBat-prot2_CO: Bat-prot2.3 Q22.4 | length 594.3
  Botton Layer w20: Bat-prot2.3 856.32,3270.87 856.32,3208.68 985,3080 1068.43,3080 Q22.4
NetBat-prot2_DO: Bat-prot2.1 Q21.4 | length 998.2
  Top Layer w20: v1(718,3294) 718,3150 786,3082 889,3082 v1(1265,3458)
  Botton Layer w20: Bat-prot2.1 717.9,3294.1 v1(718,3294) ; Q21.4 1238,3485 v1(1265,3458)
NetBat-prot2_VDD: Bat-prot2.5 Cprot2.2 Rprot21.2 | length 1217.6
  Top Layer w20: v1(816,3125) 855,3125 1085,3355 1085,3606 v1(986,3705)
  Botton Layer w20: Bat-prot2.5 755.3,3185.7 v1(816,3125) ; v1(986,3705) 986,3785 Rprot21.2 1048,3785 1128,3865 Cprot2.2
NetBat-prot2_VM: Bat-prot2.2 Rprot22.2 | length 180.8
  Botton Layer w20: Bat-prot2.2 Rprot22.2@755.3,3515
  Botton Layer w30: Rprot22.2 Rprot22.2@755.3,3515
NetBat-prot2_VSS: Bat-prot2.6 Batt-holder.2 Cprot2.1 Q21.1 Q21.2 Q21.3 | length 1659.8
  Botton Layer w20: Bat-prot2.6 717.9,3132.1 840,3010 Batt-holder.2@1230,3010 ; Q21.3 1120,3535 1100,3515 1100,3465 1135,3430 1218,3430 1275,3373 1275,3085 Batt-holder.2 ; Q21.1 1193.43,3785 Cprot2.1
  Botton Layer w30: Q21.3 Q21.2 Q21.1
NetBat-prot3_CO: Bat-prot3.3 Q32.4 | length 609
  Botton Layer w20: Bat-prot3.3 255.51,3354.49 295,3315 295,3160 305,3150 533.43,3150 Q32.4
NetBat-prot3_DO: Bat-prot3.1 Q31.4 | length 749.4
  Top Layer w20: v1@235,3310.8 528.8,3310.8 v1(653,3435)
  Botton Layer w20: Bat-prot3.1 105,3310.09 105.09,3310 v1(235,3310) ; Q31.4 637.5,3485 653,3469.5 v1(653,3435)
NetBat-prot3_VDD: Bat-prot3.5 Cprot3.2 Rprot31.2 | length 1341.4
  Botton Layer w20: Bat-prot3.5 140.3,3221.35 145.49,3216.16 145.49,3165.49 120,3140 70.1,3140 45,3165.1 45,3714 116,3785 Rprot31.2 Cprot3.2
NetBat-prot3_VM: Bat-prot3.2 Rprot32.2 | length 160.6
  Botton Layer w20: Rprot32.2 140,3354.79 Bat-prot3.2
NetBat-prot3_VSS: Bat-prot3.6 Batt-holder.1 Cprot3.1 Q31.1 Q31.2 Q31.3 | length 1668.8
  Top Layer w20: v1(103,3190) 283,3010 Batt-holder.1@470,3010
  Botton Layer w20: Bat-prot3.6 102.9,3190.1 v1(103,3190) ; Batt-holder.1@470,3010 668,3208 668,3347 698,3377 698,3500 663,3535 Q31.3
  Botton Layer w30: Q31.3 Q31.2 Q31.1 632,3635 672,3675 672,3825 632,3865 Cprot3.1
NetBatt-holder_4: "Btn Alim.2" Batt-holder.4 Batt-holder.5 Batt-holder.6 Rprot11.1 Rprot21.1 Rprot31.1 | length 7522.2
  Top Layer w30: Batt-holder.4@470,160 Batt-holder.4@485,175
  Top Layer w40: Batt-holder.4@485,175 Batt-holder.5 Batt-holder.6 1795,355 1795,2220 2360,2785 2360,3240 2285,3315
  Botton Layer w20: Rprot31.1 490,3865 543,3918 740,3918 793,3865 Rprot21.1 1085,3865 1138,3918 1400,3918 1453,3865 Rprot11.1 1690,3865 1766,3941 2099,3941 2285,3755 2285,3315
NetBtn1_2: Btn1.2 C1.2 R1.2 R7.2 | length 1359.5
  Botton Layer w20: C1.2 1800,2030 R7.2 R1.2 1810,2250 1925,2365 2365,2365 Btn1.2
NetBtn2_2: Btn2.2 C2.2 R2.2 R8.2 | length 1217.9
  Botton Layer w20: C2.2 2050,2040 R8.2 R2.2 2225,2222.75 2251.57,2249.32 2360.68,2249.32 2435,2175 2435,2075 2500,2010 2775,2010 Btn2.2
NetBtn3_2: Btn3.2 C3.2 R3.2 R9.2 | length 1270.3
  Botton Layer w20: C3.2 1800,1650 R9.2 R3.2 1810,1850 1885,1925 2475,1925 Btn3.2
NetBtn4_2: Btn4.2 C4.2 R4.2 R10.2 | length 1992.1
  Top Layer w20: v1(2450,1578) 2481,1578 2573,1670 2760,1670 Btn4.2
  Botton Layer w20: C4.2 2215,1650 R10.2 ; v1(2450,1578) 2250,1578 2225,1603 R10.2 ; Btn4.2 2740,1650 2525,1650 2370,1805 2370,1850 2355,1865 2237.5,1865 2225,1852.5 R4.2 R10.2
NetC13_2: C13.2 U1.7 | length 421.9
  Botton Layer w20: C13.2 172,4230 225,4283 352,4283 440,4195 U1.7
NetC14_1: C14.1 R12.2 U1.4 | length 738.2
  Botton Layer w20: U1.4 824,4095 879,4150 879,4433 921,4475 C14.1
  Botton Layer w30: C14.1 R12.2
NetC15_1: C15.1 R12.1 | length 145
  Botton Layer w30: R12.1 C15.1
NetC16_2: C16.2 R15.1 R16.2 U2.3 | length 502
  Botton Layer w20: U2.3 1558,4180 1573,4165 R16.2 1678,4165 1713,4200 1750,4245 R15.1 C16.2
NetC23_2: C23.2 R14.1 U2.7 | length 877.3
  Botton Layer w20: U2.7 1350,4230 1464,4344 1719,4344 1775,4400 1775,4475 ; R14.1 1775,4475 ; C23.2 1800,4555 1775,4530 1775,4475
NetD2_3: D2.3 L3.2 U1.8 | length 479.4
  Top Layer w20: L3.2 L3.2@340.24,4384.76 ; L3.2@345.71,4384.76 L3.2@340.24,4384.76 ; v1(425,4300) L3.2@340.24,4384.76
  Top Layer w30: L3.2@345.71,4384.76 D2.3
  Botton Layer w20: v1@425.69,4300.69 481.39,4245 U1.8
NetL4_1: L4.1 U2.1 | length 1057.1
  Top Layer w20: L4.1 2309.65,4284.65 v1(2340,4315)
  Botton Layer w20: U2.1 1581,4280 1606,4305 2330,4305 v1(2340,4315)
NetLpowerG_1: LpowerG.1 Rled.2 | length 180.4
  Top Layer w30: Rled.2 7049,2075 7050.03,2076.03 LpowerG.1
NetPot-Prot_2: Pot-Prot.2 R13.2 U1.6 | length 768.7
  Top Layer w30: v1(444,4145) 860,4145 Pot-Prot.2
  Botton Layer w30: R13.2 331,4230 416,4145 v1(444,4145) U1.6
NetPot-Prot_3: Pot-Prot.3 R6.1 | length 184
  Botton Layer w30: Pot-Prot.3 1000,4245 R6.1
NetQ11_5: Q11.5 Q11.6 Q11.7 Q11.8 Q12.5 Q12.6 Q12.7 Q12.8 | length 430
  Botton Layer w20: Q12.5 Q12.6 Q12.7 Q12.8
  Botton Layer w30: Q12.8 Q11.5 Q11.6 Q11.7 Q11.8
NetQ21_5: Q21.5 Q21.6 Q21.7 Q21.8 Q22.5 Q22.6 Q22.7 Q22.8 | length 430
  Botton Layer w20: Q22.5 Q22.6 Q22.7 Q22.8
  Botton Layer w30: Q22.8 Q21.5 Q21.6 Q21.7 Q21.8
NetQ31_5: Q31.5 Q31.6 Q31.7 Q31.8 Q32.5 Q32.6 Q32.7 Q32.8 | length 430
  Botton Layer w20: Q32.5 Q32.6 Q32.7 Q32.8
  Botton Layer w30: Q32.8 Q31.5 Q31.6 Q31.7 Q31.8
"Out CS": 74HC4050.2 SDsocket.2 | length 1139.6
  Top Layer w20: v2(6460,3045) 6769.01,2735.99 SDsocket.2
  Botton Layer w20: 74HC4050.2@6040,2950 6065,2950 6260,3145 6360,3145 v2(6460,3045)
"Out Mosi": 74HC4050.6 SDsocket.3 | length 1225.4
  Top Layer w20: 74HC4050.6 6291,2289 6504,2289 6775,2560 6775,2645 6822.68,2692.68 SDsocket.3
"Out SCK": 74HC4050.4 SDsocket.5 | length 1598.8
  Top Layer w20: 74HC4050.4@6035,2750 6145,2860 6145,2980 6270,3105 v2(6535,3105) 6725,3105 7015,2815 7015,2615 7006.06,2606.06 SDsocket.5
R/W: Arduino.35 LCD.15 | length 402.5
  Botton Layer w10: LCD.15 3045,925 Arduino.35
RS: Arduino.36 LCD.16 | length 638.9
  Botton Layer w10: LCD.16 2820,1150 2886,1150 3055,981 3256,981 Arduino.36
RST: LCD.14
RX1: Arduino.15 RFD.9 | length 4225.7
  Top Layer w20: RFD.9 2500,2860 2500,2545 2635,2410 3895,2410 4160,2145 v2(4160,585)
  Botton Layer w20: v2(4160,585) 4160,265 Arduino.15
RX2: Arduino.17 GPS.3 | length 4084.4
  Top Layer w20: GPS.3 4245,3515 4245,470 Arduino.17
"SCK Mega": 74HC4050.5 Arduino.52 | length 3575.5
  Botton Layer w30: Arduino.52 5865,1825 6180,2140 6180,2500 74HC4050.5
SCL: Arduino.21 Compas.1 | length 5258.1
  Top Layer w20: Arduino.21 3655,170 4325,170 4375,220 4375,313 5905,1843 5905,3111.19 6324.29,3530.48 6395.9,3530.48 Compas.1
SDA: Arduino.20 Compas.2 | length 5715.5
  Top Layer w20: Arduino.20 3643,282 3575,282 3545,252 3545,167 3600,112 4350,112 4421,183 4421,272 5965,1816 5965,3090 6065,3190 6160,3190 Compas.2
TX1: Arduino.14 RFD.7 | length 4132.8
  Top Layer w20: v1(3730,2490) 3872,2490 4205,2157 v2(4205,530)
  Botton Layer w20: RFD.7 2550,2810 2550,2540 2600,2490 v1(3730,2490) ; v2(4205,530) 4205,320 Arduino.14
TX2: Arduino.16 GPS.2 | length 5757.5
  Top Layer w30: GPS.2 3665,3995 3665,4320 3720,4375 3940,4375 5055,3260 5055,1180 Arduino.16
Vbat+: "Btn Alim.1" C5.plus C8.2 C9.2 C17.plus C18.2 C19.2 L3.1 R14.2 U1.2 U1.3 U2.5 U2.8 | length 6919.6
  Top Layer w20: v1(635,4650) 961,4650 ; C17.plus@1325,3909 v1(1325,4130) 1325,4152 ; v1(1533,4650) 961,4650 ; v1(1628,4455) 1325,4152 ; 961,4650 1239,4372 1239,4371 v1(1330,4280) 1325,4275 1325,4152
  Top Layer w30: C5.plus 195,3887 195,4028 50,4173 50,4580.24 75,4605.24 L3.1 v1(489.76,4605.24) ; C17.plus 1662,3887 1749,3800 1749,3315 1800,3264 2236,3264 2285,3215
  Botton Layer w20: v1(635,4650) C8.2 ; C9.2 C8.2 ; U1.3 U1.2 638,4195 452,4381 452,4487 520,4555 C8.2 ; U2.5 v1(1325,4130) ; U2.8 v1(1330,4280) 1330,4307 1423,4400 1573,4400 v1(1628,4455)
  Botton Layer w30: v1(489.76,4605.24) C8.2 ; C18.2 C19.2 1628,4555 ; v1(1533,4650) 1628,4555 ; v1(1628,4455) 1628,4555 ; R14.2 1628,4555
VEE: LCD.18 Pot-Ecran.1 | length 389.1
  Botton Layer w30: Pot-Ecran.1 2515,985 2730,1200 LCD.18
VO: LCD.3 Pot-Ecran.2 | length 594.6
  Top Layer w20: Pot-Ecran.2 2630,840 2675,795 2675,626.37 2749.9,551.47 2818.53,551.47 LCD.3
Vreg3.3: C6.2 C16.1 C21.2 C22.plus F2.2 L4.2 R15.2 | length 2450.6
  Top Layer w30: C22.plus 2160,3887 2160,4100.35 L4.2 2450.35,4115.35 2535,4200 F2.2
  Botton Layer w20: F2.2@2535,4415 F2.2
  Botton Layer w30: R15.2 C16.1 2285,4165 F2.2@2535,4415 ; C21.2 2075,4555 2083.15,4563.15 C6.2 2406.85,4563.15 F2.2
Vreg5: C7.plus C12.2 D2.1 F1.2 R6.2 | length 2838.9
  Top Layer w20: D2.1 729.06,4572.78 v1(758,4601.72)
  Top Layer w30: D2.1 934,4500 1000,4434 v1(1000,4165) 1000,3903 984,3887 C7.plus
  Botton Layer w20: v1(758,4601.72) 804.72,4555 C12.2 ; R6.2 1085,4050 1150,3985 F1.2
  Botton Layer w30: v1(1000,4165) R6.2
VSS: LCD.1 Recran.2 | length 299.4
  Top Layer w30: Recran.2 2775,305 LCD.1
pads on no net: 74HC4050.9 74HC4050.10 74HC4050.11 74HC4050.12 74HC4050.13 74HC4050.14 74HC4050.15 74HC4050.16 Arduino.0 Arduino.1 Arduino.2 Arduino.3.3V Arduino.5 Arduino.6 Arduino.7 Arduino.8 Arduino.9 Arduino.10 Arduino.11 Arduino.12 Arduino.13 Arduino.30 Arduino.31 Arduino.32 Arduino.38 Arduino.39 Arduino.41 Arduino.42 Arduino.43 Arduino.44 Arduino.45 Arduino.46 Arduino.47 Arduino.48 Arduino.49 Arduino.99 Arduino.A0 Arduino.A1 Arduino.A2 Arduino.A3 Arduino.A4 Arduino.A5 Arduino.A6 Arduino.A7 Arduino.A8 Arduino.A9 Arduino.A10 Arduino.A11 Arduino.A12 Arduino.A13 Arduino.A14 Arduino.A15 Arduino.AREF Arduino.IOREF Arduino.RST Arduino.VIN Bat-prot1.4 Bat-prot2.4 Bat-prot3.4 Batt-holder.0 Compas.0 Compas.3 Compas.10 Compas.11 GPS.1 GPS.5 GPS.6 GPS.7 Pot-Prot.1 RFD.0 RFD.3 RFD.5 RFD.6 RFD.8 RFD.10 RFD.11 RFD.12 RFD.13 RFD.14 RFD.15 SDsocket.1 SDsocket.4 SDsocket.8 SDsocket.9 SDsocket.10

## Polygon pours and split planes (outlines as drawn)
GND on Ground Plane (split plane): 7234.9,4591.68 7234.9,108.32 7146.68,20.1 108.32,20.1 20.1,108.32 20.1,4591.68 108.32,4679.9 7146.68,4679.9
+3.3V on Power Plane (split plane): 7234.9,4591.68 7234.9,2290.1 5997.11,2290.1 5865.1,2422.11 5865.1,4679.9 7146.68,4679.9
5V on Power Plane (split plane): 5854.9,2420 5855.29,2418.05 5856.4,2416.4 5991.4,2281.4 5993.05,2280.29 5995,2279.9 7234.9,2279.9 7234.9,108.32 7146.68,20.1 108.32,20.1 20.1,108.32 20.1,4591.68 108.32,4679.9 5854.9,4679.9

## Other copper
Power Plane (plane layer: these items are gaps in the copper):
  lines w10: 5860,4700 5860,2420 5995,2285 7255,2285

## Silkscreen, mask and mechanical layers (free items; w line width, h text height)
Top Overlay:
  the board outline again, w5
  text "REV. AAA" at 5850,3900 h60 r90
  text "GAUL 2017" at 5660,2815 h180 r90
  text "CONN FEMALE" at 2855,2605 h60 r90
  text "JUICE HERE" at 925,1620 h60

## Text inside footprints (layer, text, board x,y; h text height)
Arduino: Top Overlay "AREF" at 6060,305 h20 r45; Top Overlay "GND" at 5960,305 h20 r45; Top Overlay "PWM13" at 5860,305 h20 r45; Top Overlay "PWM12" at 5760,305 h20 r45; Top Overlay "PWM11" at 5660,305 h20 r45; Top Overlay "PWM10" at 5560,305 h20 r45; Top Overlay "PWM9" at 5460,305 h20 r45; Top Overlay "PWM8" at 5360,305 h20 r45; Top Overlay "PWM7" at 5200,307.07 h20 r45; Top Overlay "PWM6" at 5100,307.07 h20 r45; Top Overlay "PWM5" at 5000,307.07 h20 r45; Top Overlay "PWM4" at 4900,307.07 h20 r45; Top Overlay "PWM3" at 4800,307.07 h20 r45; Top Overlay "PWM2" at 4700,300 h20 r45; Top Overlay "TX0" at 4600,300 h20 r45; Top Overlay "TX3" at 4300,300 h20 r45; Top Overlay "RX3" at 4200,300 h20 r45; Top Overlay "TX2" at 4100,300 h20 r45; Top Overlay "RX2" at 4000,300 h20 r45; Top Overlay "TX1" at 3900,300 h20 r45; Top Overlay "RX1" at 3800,300 h20 r45; Top Overlay "SDA" at 3700,300 h20 r45; Top Overlay "GND" at 3125,1950 h20 r225; Top Overlay "53" at 3125,1850 h20 r225; Top Overlay "51" at 3125,1750 h20 r225; Top Overlay "49" at 3125,1650 h20 r225; Top Overlay "47" at 3125,1550 h20 r225; Top Overlay "45" at 3125,1450 h20 r225; Top Overlay "43" at 3125,1350 h20 r225; Top Overlay "41" at 3125,1250 h20 r225; Top Overlay "39" at 3125,1150 h20 r225; Top Overlay "37" at 3125,1050 h20 r225; Top Overlay "35" at 3125,950 h20 r225; Top Overlay "33" at 3125,850 h20 r225; Top Overlay "31" at 3125,750 h20 r225; Top Overlay "29" at 3125,650 h20 r225; Top Overlay "27" at 3125,550 h20 r225; Top Overlay "25" at 3125,450 h20 r225; Top Overlay "23" at 3125,350 h20 r225; Top Overlay "5V" at 3125,250 h20 r225; Top Overlay "50" at 3425,1725 h20 r135; Top Overlay "GND" at 3425,1925 h20 r135; Top Overlay "52" at 3425,1825 h20 r135; Top Overlay "48" at 3425,1625 h20 r135; Top Overlay "46" at 3425,1525 h20 r135; Top Overlay "44" at 3425,1425 h20 r135; Top Overlay "42" at 3425,1325 h20 r135; Top Overlay "40" at 3425,1225 h20 r135; Top Overlay "38" at 3425,1125 h20 r135; Top Overlay "36" at 3425,1025 h20 r135; Top Overlay "34" at 3425,925 h20 r135; Top Overlay "32" at 3425,825 h20 r135; Top Overlay "30" at 3425,725 h20 r135; Top Overlay "28" at 3425,625 h20 r135; Top Overlay "26" at 3425,525 h20 r135; Top Overlay "24" at 3425,425 h20 r135; Top Overlay "22" at 3425,325 h20 r135; Top Overlay "5V" at 3425,225 h20 r135; Top Overlay "SCL" at 3600,300 h20 r45; Top Overlay "RX0" at 4500,300 h20 r45; Top Overlay "AD15" at 3400,2050 h20 r225; Top Overlay "AD14" at 3500,2050 h20 r225; Top Overlay "AD13" at 3600,2050 h20 r225; Top Overlay "AD12" at 3700,2050 h20 r225; Top Overlay "AD11" at 3800,2050 h20 r225; Top Overlay "AD10" at 3900,2050 h20 r225; Top Overlay "AD9" at 4000,2050 h20 r225; Top Overlay "AD8" at 4100,2050 h20 r225; Top Overlay "AD7" at 4300,2050 h20 r225; Top Overlay "AD6" at 4400,2050 h20 r225; Top Overlay "AD5" at 4500,2050 h20 r225; Top Overlay "AD4" at 4600,2050 h20 r225; Top Overlay "AD3" at 4700,2050 h20 r225; Top Overlay "AD2" at 4800,2050 h20 r225; Top Overlay "AD1" at 4900,2050 h20 r225; Top Overlay "AD0" at 5000,2050 h20 r225; Top Overlay "Vin" at 5200,2050 h20 r225; Top Overlay "GND" at 5300,2050 h20 r225; Top Overlay "GND" at 5400,2050 h20 r225; Top Overlay "5v" at 5500,2050 h20 r225; Top Overlay "3v3" at 5600,2050 h20 r225; Top Overlay "RESET" at 5700,2050 h20 r225
Batt-holder: Top Overlay "+" at 340,3030 h60 r270; Top Overlay "-" at 340,230 h60 r270; Top Overlay "+" at 1090,3030 h60 r270; Top Overlay "+" at 1840,3030 h60 r270; Top Overlay "-" at 1090,230 h60 r270; Top Overlay "-" at 1840,230 h60 r270
F1: Top Overlay "FUSE" at 2835,3940 h60
F2: Top Overlay "FUSE" at 2850,4395 h60
LCD: Top Overlay "2" at 2790,300 h50 r90; Top Overlay "1" at 2890,300 h50 r90; Top Overlay "19" at 2890,1360 h50 r90; Top Overlay "20" at 2790,1360 h50 r90
Pot-Ecran: Top Overlay "67W R" at 2565,875 h30 r270
Pot-Prot: Top Overlay "67W R" at 880,4180 h30 r90